# EAGLE board tetris_mega_3 (EAGLE 6.2)
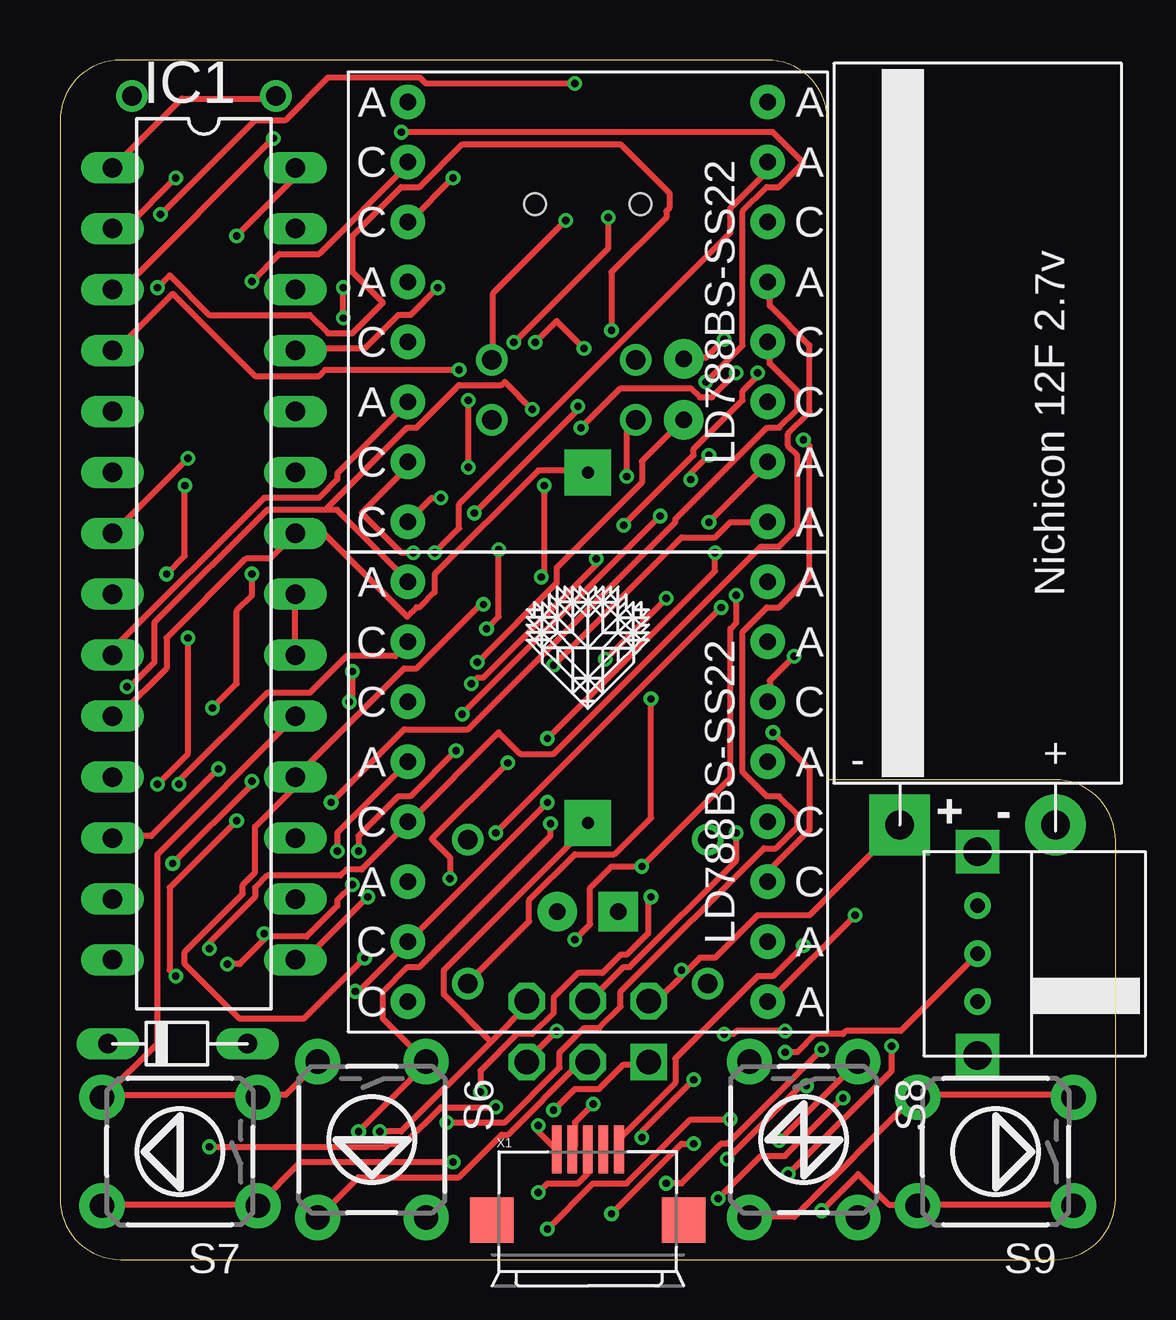
[diagram p0: board, top side]
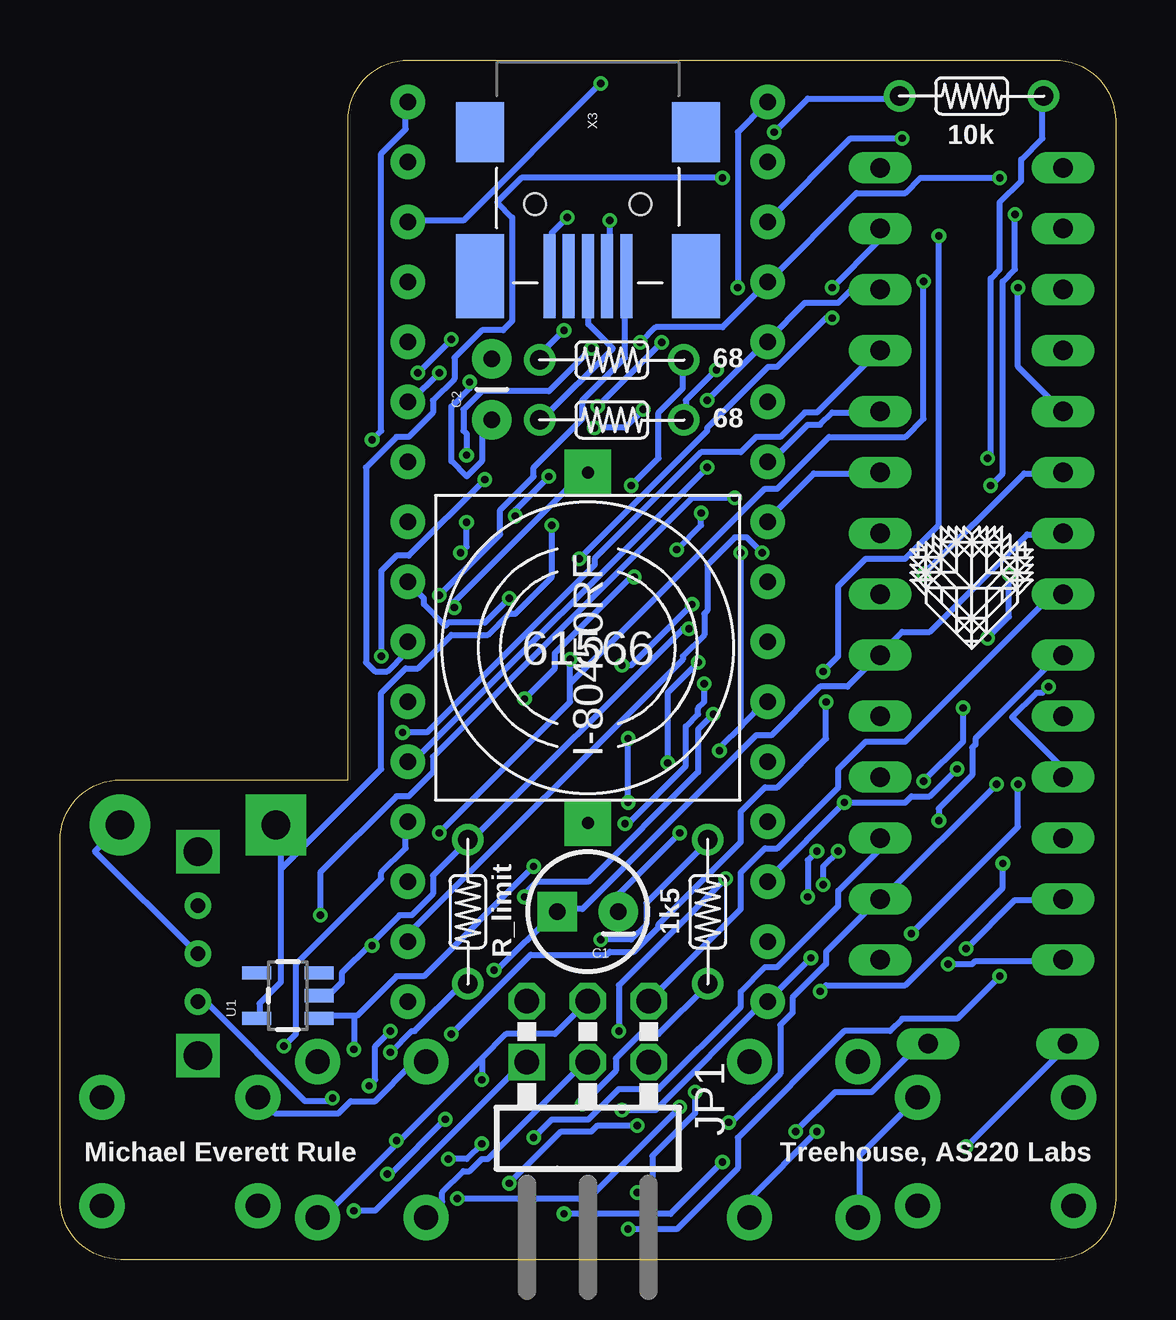
[diagram p1: board, bottom side, seen from below]

Size 44 x 50 mm. Coordinates in mm from the lower left corner, seen from the top.
Outline: 0,47.46 0,2.54 arc90 2.54,0 41.46,0 arc90 44,2.54 44,17.46 arc90 41.46,20 32,20 32,47.46 arc90 29.46,50 2.54,50 arc90 0,47.46
Copper layers (1*16): Top 0.035mm / dielectric 1.5mm / Bottom 0.035mm
Design rules: minimum track width 10mil, minimum drill 12mil, track to track 7mil, track to pad 7mil, pad to pad 7mil, via to via 7mil, smd to smd 0mil, copper to edge 20mil, drill to drill 10mil, minimum pad ring 10mil, minimum via ring 6mil, stop-mask expansion 2mil, vias tented up to drill 100mil, thermal gap 10mil

## Footprints (pad centres in the part's own frame; a part is rotated, then mirrored left to right if it is on the bottom)
CPOL-RADIAL-10UF-25V = drill 0.7 pad 1.651 square: 1 1.27,0 | drill 0.7 pad 1.651: 2 -1.27,0
CAP-PTH-SMALL = drill 0.7 pad 1.651: 1 0,0; 2 2.54,0
DIL28-3 = drill 0.813 long: 1 -16.51,-3.81; 2 -13.97,-3.81; 3 -11.43,-3.81; 4 -8.89,-3.81; 5 -6.35,-3.81; 6 -3.81,-3.81; 7 -1.27,-3.81; 8 1.27,-3.81; 9 3.81,-3.81; 10 6.35,-3.81; 11 8.89,-3.81; 12 11.43,-3.81; 13 13.97,-3.81; 14 16.51,-3.81; 15 16.51,3.81; 16 13.97,3.81; 17 11.43,3.81; 18 8.89,3.81; 19 6.35,3.81; 20 3.81,3.81; 21 1.27,3.81; 22 -1.27,3.81; 23 -3.81,3.81; 24 -6.35,3.81; 25 -8.89,3.81; 26 -11.43,3.81; 27 -13.97,3.81; 28 -16.51,3.81
AVR-ISP-6R = drill 1.016 square: 1 -2.54,-1.27 | drill 1.016 octagon: 2 -2.54,1.27; 3 0,-1.27; 4 0,1.27; 5 2.54,-1.27; 6 2.54,1.27
TACTILE-PTH = drill 1.016 pad 1.88: 1 -3.251,2.261; 2 3.251,2.261; 3 -3.251,-2.261; 4 3.251,-2.261
SOT23-5 = smd 0.55 x 1.2: 1 -0.95,-1.3; 2 0,-1.3; 3 0.95,-1.3; 4 0.95,1.3; 5 -0.95,1.3
LD788BS-SS22 = drill 0.7 pad 1.422: A1 -7.5,8.75; A2 -7.5,1.25; A3 -7.5,-3.75; A4 7.5,8.75; A5 7.5,6.25; A6 7.5,1.25; A7 7.5,-6.25; A8 7.5,-8.75; C1 -7.5,6.25; C2 -7.5,3.75; C3 -7.5,-1.25; C4 -7.5,-6.25; C5 -7.5,-8.75; C6 7.5,3.75; C7 7.5,-1.25; C8 7.5,-3.75
D-7.5 = drill 0.813 long: A 2.81,0; C -3,0
ISK4.1K_I-80450RF_I2G = drill 0.5 pad 1.93 square: P$1 -7.303,0; P$2 7.303,0
NICHICON_10X30 = drill 1.2 pad 2.54 square: P$1 2.75,-1.75 | drill 1.2 pad 2.54: P$2 9.25,-1.75
R-6 = drill 0.8: P$1 -3,0; P$2 3,0
SWITCH = drill 0.6: 1 2.25,6.25; 2 2.25,4.25; 3 2.25,2.25 | drill 1.2 square: C1 2.25,8.5; C2 2.25,0
USB-MICROB = smd 0.4 x 2: D+ 0,3.1; D- -0.65,3.1; GND 1.3,3.1; ID 0.65,3.1; VBUS -1.3,3.1 | smd 1.8 x 1.9: GND@2 -4,0.15; GND@3 4,0.15
USB-MINIB-OLD = smd 2.5 x 2: 1 -3,-4.5; 2 -3,4.5 | smd 3.5 x 2: 3 3,-4.5; 4 3,4.5 | smd 3.5 x 0.5: D+ 3,0; D- 3,0.8; GND 3,-1.6; ID 3,-0.8; VBUS 3.01,1.61 | hole 0.9: 0,2.2; 0,-2.2

## Placement (x,y rotation side)
C1  [CPOL-RADIAL-10UF-25V]  22,14.5 180 bottom
C2  [CAP-PTH-SMALL]  26,35 90 bottom
IC1  MEGA8-P  [DIL28-3]  6,29 270 top
JP1  AVR-ISP-6R  [AVR-ISP-6R]  22,9.5 0 bottom
S6  [TACTILE-PTH]  13,5 270 top
S7  [TACTILE-PTH]  5,4.5 180 top
S8  [TACTILE-PTH]  31,5 270 top
S9  [TACTILE-PTH]  39,4.5 180 top
U1  V_REG_LDOSMD  [SOT23-5]  34.5,11 90 bottom
U$1  LD788BS-SS22  [LD788BS-SS22]  22,19.5 0 top
U$2  LD788BS-SS22  [LD788BS-SS22]  22,39.5 0 top
U$3  D-6  [D-7.5]  5,9 0 top
U$4  I-80450RF  [ISK4.1K_I-80450RF_I2G]  22,25.5 270 bottom
U$5  NICHICON_12F  [NICHICON_10X30]  32.25,19.86 0 top
U$6  R-6  [R-6]  27,14.5 90 bottom
U$7  R-6  [R-6]  6,48.5 0 bottom
U$8  SWITCH  [SWITCH]  36,8.5 0 top
U$9  R-6  [R-6]  21,35 180 bottom
U$10  R-6  [R-6]  21,37.5 0 bottom
U$11  R-6  [R-6]  17,14.5 90 bottom
U$13  [LOGO]  6,28 0 bottom
U$14  [LOGO]  22,25.5 0 top
X1  USB-MICROB  [USB-MICROB]  22,1.5 0 top
X3  USBOLD  [USB-MINIB-OLD]  22,44 270 bottom

## Library data of the parts
C1 C2 S6-S9 U1 X1 X3 = SparkFun
IC1 = atmel; OC_FARNELL: unknown; OC_NEWARK: unknown
JP1 = avr-5-4.16
U$1-U$11 = mrule
U$13 U$14 = mrule2

## Nets
N$1: IC1.17 JP1.4 S8.1 S8.2 U$1.A4 U$2.C1
N$2: IC1.3 U$1.A5 U$2.C2
N$3: IC1.2 U$1.C6 U$2.A2
N$4: IC1.26 U$1.A6 U$2.C3
N$5: IC1.9 U$1.C7 U$2.A3
N$6: IC1.24 U$1.A7 U$2.C4
N$7: IC1.23 U$1.A8 U$2.C5
N$8: IC1.25 U$1.C8 U$2.A1
N$9: U$5.P$2 U$6.P$1 U$8.2
N$10: IC1.15 U$1.C2 U$2.A5
N$11: IC1.14 U$1.A2 U$2.C6
N$12: IC1.13 U$1.C3 U$2.A6
N$13: IC1.12 U$1.A3 U$2.C7
N$14: IC1.11 U$1.A1 U$2.C8
N$15: IC1.6 U$1.C4 U$2.A7
N$16: IC1.18 JP1.1 S9.1 S9.2 U$1.C5 U$2.A8
N$17: C1.2 IC1.10 IC1.22 U$4.P$1
N$18: IC1.19 JP1.3 S6.3 S6.4 S7.3 S7.4 S8.3 S8.4 S9.3 S9.4
N$19: IC1.5 U$10.P$1
N$20: IC1.27 S6.1 S6.2
N$21: U$3.C U$8.3
N$22: IC1.8 JP1.6 U$3.A U$4.P$2
N$23: U1.1 U$11.P$2 X1.VBUS X3.VBUS
N$24: U1.2 U$6.P$2 X1.GND X3.GND
N$25: U$10.P$2 U$11.P$1 X1.D- X3.D-
N$26: C1.1 C2.2 IC1.7 IC1.20 IC1.21 JP1.2 U1.5 U$5.P$1 U$7.P$2
N$27: IC1.4 U$9.P$1
N$28: IC1.16 U$1.C1 U$2.A4
N$29: C2.1 IC1.1 JP1.5 U$7.P$1
N$30: U$9.P$2 X1.D+ X3.D+
N$31: IC1.28 S7.1 S7.2

## Tracks (layer width: path | path; a pad name or v marks a point on that pad's centre or on a via)
N$1  (via drill 0.3)
  Top 0.254: v24.26,5.08 24.26,5.33 v26.42,7.49 | v22.73,25.02 v25.27,27.56 | v28.19,17.78 28.19,16.64 23.75,12.19 23.5,12.19 22.1,10.79 JP1.4 | v8,40.77 9.14,41.91 10.79,41.91 14.48,45.59 14.48,45.72 U$2.C1 | v29.97,4.95 33.15,8.13 S8.1
  Bottom 0.254: v24.26,5.08 23.5,5.84 21.97,5.84 20.7,7.11 19.05,7.11 15.62,10.54 15.62,11.18 14.61,12.19 14.1,12.19 11.56,14.73 11.56,15.37 9.91,17.02 9.91,17.53 IC1.17 | 26.42,8.38 v26.42,7.49 | 26.42,8.38 25.4,9.4 23.37,9.4 22.1,10.67 JP1.4 | v25.27,27.56 26.29,26.54 27.81,26.54 27.94,26.42 28.83,27.3 28.83,27.56 29.46,28.19 U$1.A4 | 22.73,24 22.73,23.24 v28.19,17.78 | 22.73,24 v22.73,25.02 | v8,40.77 8,35.05 8.76,34.29 11.94,34.29 14.1,32.13 14.61,32.13 22.73,24 | 26.42,8.38 29.91,4.89 | 29.91,4.89 33.02,1.78 33.15,1.78 S8.2 | v29.97,4.95 29.91,4.89
N$2  (via drill 0.3)
  Top 0.254: v8.89,46.74 2.67,40.51 2.29,40.51 IC1.3 | v16.38,45.09 14.61,43.31 U$2.C2
  Bottom 0.254: v8.89,46.74 11.05,46.74 14.48,43.31 U$2.C2 | v16.38,45.09 24.77,45.09 25.78,44.07 25.15,43.43 25.15,39.12 25.53,38.73 26.42,38.73 27.56,37.59 27.56,36.7 28.45,35.81 28.45,35.31 29.46,34.29 29.97,34.29 31.24,33.02 31.24,24.89 30.86,24.51 30.35,24.51 29.59,25.27 29.59,25.65 U$1.A5
N$3  (via drill 0.3)
  Top 0.254: v4.83,45.09 2.79,43.05 2.29,43.05 IC1.2 | v30.61,25.15 29.59,24.13 29.59,23.37 U$1.C6 | v26.29,32.51 26.29,32.77 v27.05,33.53 | v21.84,37.97 20.7,39.12 v19.81,38.23
  Bottom 0.254: v4.83,45.09 8.13,45.09 8.76,44.45 10.79,44.45 14.48,40.77 U$2.A2 14.61,40.64 16.38,38.86 19.18,38.86 v19.81,38.23 | v30.61,25.15 30.61,28.7 29.97,29.34 29.46,29.34 v26.29,32.51 | v27.05,33.53 27.05,34.42 27.18,34.54 27.18,35.43 26.42,36.2 23.62,36.2 v21.84,37.97
N$4  (via drill 0.3)
  Top 0.254: v17.02,35.81 v17.02,33.02
  Bottom 0.254: IC1.26 9.91,40.39 11.05,40.39 11.56,39.88 12.95,39.88 14.48,38.35 U$2.C3 14.61,38.23 v17.02,35.81 | v17.02,33.02 29.21,20.83 29.46,20.83 U$1.A6
N$5  (via drill 0.3)
  Top 0.254: IC1.9 2.29,25.27 2.29,25.53 8.51,31.75 10.79,31.75 11.56,32.51 11.56,32.77 14.48,35.69 U$2.A3 | v34.67,8.89 34.67,7.87 v30.35,3.56 | v27.94,5.84 26.29,5.84 23.62,3.17 22.23,3.17 v20.32,1.27 | v4.83,11.81 4.57,12.06 4.57,15.49 v7.37,18.29
  Bottom 0.254: v34.67,8.89 34.16,9.4 34.16,12.32 30.61,15.88 30.61,16.13 29.59,17.14 29.59,18.16 U$1.C7 | v30.35,3.56 30.23,3.56 v27.94,5.84 | v20.32,1.27 18.29,1.27 15.75,3.81 15.75,5.08 11.3,9.53 9.4,9.53 8.89,10.03 6.6,10.03 v4.83,11.81 | v7.37,18.29 7.37,18.8 5.97,20.19 5.97,21.34 5.84,21.46 5.84,21.72 2.29,25.27 IC1.9
N$6  (via drill 0.3)
  Top 0.254: v14.73,29.46 14.22,29.46 12.57,31.11 14.61,33.15 U$2.C4
  Bottom 0.254: IC1.24 9.91,35.31 11.81,35.31 12.32,34.8 12.83,34.8 14.48,33.15 U$2.C4 | v14.73,29.46 15.37,30.1 15.88,30.1 17.02,28.96 17.02,27.05 17.14,26.92 17.14,26.04 18.03,25.15 18.03,25.02 29.46,13.59 29.46,13.34 U$1.A7
N$7  (via drill 0.3)
  Top 0.254: v33.15,14.35 29.59,10.79 U$1.A8 | v15.88,31.75 15.49,31.75 14.61,30.86 U$2.C5
  Bottom 0.254: IC1.23 9.91,32.77 12.57,32.77 14.48,30.86 U$2.C5 | v33.15,14.35 33.15,16.13 29.97,19.3 29.46,19.3 28.45,20.32 28.45,20.95 17.65,31.75 v15.88,31.75
N$8  (via drill 0.3)
  Top 0.254: v15.75,40.51 14.61,39.37 14.1,39.37 12.7,37.97 9.91,37.97 IC1.25 | v29.72,21.97 31.24,20.45 31.24,17.91 29.59,16.26 29.59,15.88 U$1.C8
  Bottom 0.254: v15.75,40.51 15.75,46.99 14.61,48.13 U$2.A1 | v29.72,21.97 28.7,21.97 21.72,28.96 21.72,29.21 17.27,33.66 15.62,33.66 14.99,34.29 13.97,34.29 12.95,35.31 12.45,35.31 9.91,37.85 IC1.25
N$9  (via drill 0.3)
  Top 0.254: v30.23,8.64 30.73,8.64 31.5,9.4 32.64,9.4 32.77,9.53 35.05,9.53 38.23,12.7 U$8.2
  Bottom 0.254: U$8.2 38.35,12.83 42.55,17.02 41.53,18.03 U$5.P$2 | v30.23,8.64 29.34,9.53 29.21,9.53 27.3,11.43 27.05,11.43 U$6.P$1
N$10  (via drill 0.3)
  Top 0.254: v12.83,15.11 10.29,12.57 9.91,12.57 IC1.15 | v12.45,17.02 12.45,17.65 14.1,19.3 14.61,19.3 v16.51,21.21 | v15.62,29.46 16.64,30.48 16.64,31.5 27.94,42.8 27.94,43.81 29.46,45.34 29.46,45.72 U$2.A5
  Bottom 0.254: v12.83,15.11 12.83,16.64 v12.45,17.02 | v16.51,21.21 16.51,21.34 15.56,22.29 | 15.56,22.29 14.61,23.24 U$1.C2 | v15.62,29.46 15.62,22.35 15.56,22.29
N$11  (via drill 0.3)
  Top 0.254: v6.99,12.32 7.49,12.32 8.57,13.4 | 8.57,13.4 8.64,13.46 10.29,13.46 11.56,14.73 11.56,14.99 v12.19,15.62 | v11.56,17.02 11.56,17.78 14.48,20.7 U$1.A2 | v21.46,49.02 15.24,49.02 14.99,49.28 11.18,49.28 9.4,47.5 8.13,47.5 v4.19,43.56 | v5.21,32.26 5.21,29.34 v4.45,28.57 | v5.33,25.91 5.33,21.08 v4.06,19.81 | v8.51,13.59 8.51,13.46 8.57,13.4
  Bottom 0.254: v6.99,12.32 5.97,12.32 5.84,12.45 2.29,12.45 IC1.14 | v12.19,15.62 12.19,16.38 v11.56,17.02 | v21.46,49.02 27.18,43.31 29.46,43.31 U$2.C6 | v4.19,43.56 4.19,41.27 4.7,40.77 4.7,32.77 v5.21,32.26 | v4.45,28.57 4.45,26.8 v5.33,25.91 | v4.06,19.81 4.06,18.03 v8.51,13.59
N$12  (via drill 0.3)
  Top 0.254: v6.22,12.95 6.22,13.21 8.13,15.11 8.13,15.49 8.64,16 11.68,16 11.94,16.26 12.57,16.26 14.48,18.16 U$1.C3 14.61,18.29 18.29,21.97 19.18,21.08 20.57,21.08 29.21,29.72 29.97,29.72 30.73,30.48 30.73,33.53 30.35,33.91 30.35,34.42 31.24,35.31 31.24,38.1 29.59,39.75 29.59,40.64 U$2.A6
  Bottom 0.254: v6.22,12.95 4.19,14.99 2.29,14.99 IC1.13
N$13  (via drill 0.3)
  Top 0.254: v6.6,20.45 3.81,17.65 2.29,17.65 IC1.12 | v11.3,19.05 14.35,22.1 17.02,22.1 25.65,30.73 25.65,30.86 29.46,34.67 29.97,34.67 30.73,35.43 30.73,36.2 29.59,37.34 29.59,38.23 U$2.C7
  Bottom 0.254: v6.6,20.45 7.75,19.3 8.51,19.3 8.76,19.05 v11.3,19.05 14.48,15.88 U$1.A3
N$14  (via drill 0.3)
  Top 0.254: v2.79,23.88 2.92,23.88 3.94,24.89 3.94,26.54 8.64,31.24 11.05,31.24 | 11.05,31.24 11.56,31.24 14.48,28.32 U$1.A1 | v28.19,36.96 27.18,35.94 26.67,35.94 26.29,36.32 23.37,36.32 v21.72,34.67 | v19.68,35.43 18.54,36.58 18.41,36.45 16.64,36.45 14.86,34.67 14.48,34.67 11.05,31.24
  Bottom 0.254: v2.79,23.88 3.05,23.62 3.3,23.62 4.32,22.61 2.29,20.57 2.29,20.19 IC1.11 | v28.19,36.96 29.34,35.81 29.46,35.81 U$2.C8 | v21.72,34.67 20.45,34.67 v19.68,35.43
N$15  (via drill 0.3)
  Top 0.254: v8,28.57 8,27.69 7.37,27.05 7.37,24 v6.35,22.99 | v8,19.94 8,19.81 v4.7,16.51 | v12.32,11.18 12.45,11.18 14.48,13.21 U$1.C4 14.61,13.34 v20.32,19.05 | v27.05,30.73 29.46,33.15 U$2.A7 | v27.3,29.46 27.3,28.7 v20.32,21.72
  Bottom 0.254: v8,28.57 3.81,32.77 2.29,32.77 IC1.6 | v6.35,22.99 6.35,21.59 v8,19.94 | v4.7,16.51 4.7,15.49 8.76,11.43 12.06,11.43 v12.32,11.18 | v27.05,30.73 27.05,29.72 v27.3,29.46 | v20.32,19.05 v20.32,21.72
N$16  (via drill 0.3)
  Top 0.254: S9.1 42.16,2.29 35.81,2.29 S9.2 35.69,2.29 34.54,2.29 33.27,3.56 v31.75,2.03 | v12.7,12.57 10.16,10.03 7.49,10.03 5.21,12.32 5.21,12.83 7.62,15.24 7.62,15.62 8.13,16.13 8.13,18.03 9.78,19.68 9.78,20.07 IC1.18 9.91,20.19 14.35,24.64 14.86,24.64 17.53,27.3 v17.65,27.3 | v20.57,24.77 25.91,30.1 27.3,30.1 27.94,30.73 29.46,30.73 U$2.A8 | v20.57,6.22 21.46,7.11 22.48,7.11 23.5,8.13 24.51,8.13 JP1.1
  Bottom 0.254: v12.7,12.57 14.48,10.79 U$1.C5 14.61,10.79 19.18,6.22 v20.57,6.22 | v20.57,24.77 20.19,24.77 v17.65,27.3 | v31.75,2.03 30.86,2.03 24.64,8.26 JP1.1
N$17  (via drill 0.3)
  Top 0.254: IC1.10 2.29,22.73 2.54,22.73 4.45,24.64 4.45,25.91 7.75,29.21 8.76,29.21 9.78,30.23 IC1.22 9.91,30.23 11.05,30.23 14.48,26.8 14.86,27.18 14.99,27.18 15.62,27.81 15.62,28.57 19.94,32.89 21.97,32.89 U$4.P$1 | v27.56,27.18 v18.16,17.78
  Bottom 0.254: v18.16,17.78 20.7,15.24 20.7,14.61 C1.2 | v27.56,27.18 27.56,27.43 22.1,32.89 U$4.P$1
N$18
  Top 0.254: S9.3 42.16,6.86 35.81,6.86 S9.4 35.69,6.86 30.61,1.78 28.83,1.78 S8.4 | S6.3 10.67,8.13 9.4,6.86 8.26,6.86 S7.3 8.13,6.86 2.03,6.86 S7.4 1.78,6.73 4.06,9.02 4.06,16.89 9.78,22.61 IC1.19 | JP1.3 21.97,8.13 21.59,8.13 18.67,5.21 18.41,5.21 16.64,3.43 12.45,3.43 10.79,1.78 S6.4
  Bottom 0.254: JP1.3 22.1,8.13 22.23,8.13 26.16,4.19 26.42,4.19 26.92,3.68 27.18,3.68 28.07,2.79 28.07,2.41 28.7,1.78 S8.4 | S8.3 28.83,8.13 29.34,8.13 30.86,6.6 31.88,6.6 32.38,6.1 35.05,6.1 35.69,6.73 S9.4 | S6.4 10.67,1.78 10.67,4.32 8.26,6.73 S7.3
N$19  (via drill 0.3)
  Top 0.254: v22.99,38.73 22.99,41.15 25.27,43.43 25.27,43.69 25.4,43.81 25.4,44.45 23.37,46.48 16.76,46.48 14.99,44.7 14.22,44.7 12.19,42.67 12.19,41.15 13.46,39.88 12.19,38.61 11.18,38.61 10.41,39.37 6.22,39.37 4.57,41.02 v4.06,40.51
  Bottom 0.254: v22.99,38.73 23.88,37.85 23.88,37.59 U$10.P$1 | v4.06,40.51 4.06,37.21 2.29,35.43 IC1.5
N$20  (via drill 0.3)
  Top 0.254: v11.81,39.24 v11.81,40.51 | v22.35,29.21 22.35,28.96 17.65,24.26 17.4,24.26 v17.14,24 | v20.45,18.16 20.45,17.65 14.99,12.19 14.48,12.19 13.46,11.18 13.46,10.03 15.24,8.26 S6.1 15.24,8.13 v12.45,5.33
  Bottom 0.254: v11.81,40.51 9.91,42.42 9.91,42.93 IC1.27 | v11.81,39.24 12.06,39.24 14.1,37.21 14.48,37.21 17.02,34.67 17.02,34.54 v22.35,29.21 | v17.14,24 17.14,23.24 17.4,22.99 17.4,22.73 17.91,22.23 17.91,20.57 20.32,18.16 v20.45,18.16 | v12.45,5.33 15.24,2.54 15.24,1.78 S6.2
N$21  (via drill 0.3)
  Top 0.254: v32.64,6.73 30.23,4.32 29.21,4.32 v27.43,2.54 | v18.16,6.35 15.88,6.35 14.35,4.83 13.72,4.83 13.59,4.7 v6.22,4.7
  Bottom 0.254: v32.64,6.73 32.77,6.6 33.78,6.6 37.85,10.67 38.23,10.67 U$8.3 | v27.43,2.54 21.97,2.54 v18.16,6.35 | v6.22,4.7 2.03,8.89 U$3.C
N$22  (via drill 0.3)
  Top 0.254: v13.34,5.33 14.22,5.33 17.97,9.08 | 17.97,9.08 19.56,10.67 JP1.6 | 17.97,9.08 16,11.05 16,12.06 21.97,18.03 21.97,18.16 U$4.P$2
  Bottom 0.254: v13.34,5.33 11.68,6.99 10.16,6.99 8.26,8.89 7.87,8.89 U$3.A | IC1.8 2.29,27.69 2.67,27.69 8.76,21.59 10.41,21.59 11.56,20.45 11.56,19.68 14.1,17.14 14.61,17.14 15.62,16.13 15.62,14.61 19.43,10.79 JP1.6
N$23  (via drill 0.3)
  Top 0.254: v21.46,13.34 22.1,13.97 22.1,15.49 22.99,16.38 v24.26,16.38 27.94,20.07 27.94,26.29 28.19,26.54 v28.19,27.69 | v19.94,5.59 19.81,5.46 20.57,4.7 X1.VBUS | v25.27,3.17 25.91,3.17 27.56,4.83 27.81,4.83 v31.75,8.76
  Bottom 0.254: 31.75,10.16 31.62,10.16 29.97,11.81 28.83,11.81 v24.26,16.38 | 31.75,10.16 33.15,10.16 U1.1 | v21.46,13.34 20.19,13.34 19.56,13.97 19.56,14.86 17.02,17.4 U$11.P$2 | v19.94,5.59 21.59,5.59 21.84,5.33 23.11,5.33 v25.27,3.17 | 31.75,10.16 v31.75,8.76 | v28.19,27.69 25.65,30.23 25.65,31.24 24.26,32.64 24.26,33.02 22.23,35.05 22.23,35.81 20.45,37.59 20.45,40.89 X3.VBUS
N$24  (via drill 0.3)
  Top 0.254: v30.99,13.08 29.72,11.81 29.08,11.81 25.65,8.38 25.65,7.37 23.37,5.08 23.37,4.7 X1.GND | v22.86,43.43 22.86,42.16 v18.92,38.23 | v21.59,35.56 21.59,35.43 v17.27,31.11 | v18.29,29.59 18.29,26.8 v17.78,26.29
  Bottom 0.254: 31.05,13.14 29.84,14.35 29.34,14.35 28.45,15.24 28.45,16 27.05,17.4 U$6.P$2 26.92,17.4 18.03,26.29 v17.78,26.29 | 31.05,13.14 32.26,11.94 32.26,11.56 32.77,11.05 33.15,11.05 U1.2 | v30.99,13.08 31.05,13.14 | v22.86,43.43 23.5,42.8 23.5,41.02 X3.GND | v21.59,35.56 v18.92,38.23 | v17.27,31.11 17.27,30.61 v18.29,29.59
N$25  (via drill 0.3)
  Top 0.254: v21.08,43.31 18.03,40.26 18.03,37.59 U$10.P$2 | v22.23,6.48 21.46,5.71 21.46,4.7 X1.D- | v20.19,32.26 20.19,28.57 v20.07,28.45 | v24.64,23.37 24.64,18.41 23.11,16.89 21.46,16.89 19.56,14.99 19.56,14.1 17.02,11.56 U$11.P$1
  Bottom 0.254: v21.08,43.31 21.08,41.02 X3.D- | v22.23,6.48 20.83,7.87 20.83,8.38 19.81,9.4 19.05,9.4 17.02,11.43 U$11.P$1 | v20.19,32.26 19.05,33.4 19.05,35.31 18.03,36.32 18.03,37.47 U$10.P$2 | v20.07,28.45 20.19,28.45 23.37,25.27 23.37,24.64 v24.64,23.37
N$26  (via drill 0.3)
  Top 0.254: 25.97,11.87 26.67,12.57 27.3,12.57 29.08,14.35 31.24,14.35 34.92,18.03 U$5.P$1 | 25.97,11.87 24.89,10.79 24.64,10.79 JP1.2 | v27.69,38.35 26.92,37.59 26.04,37.59 C2.2 | v29.08,36.96 29.08,36.83 28.45,36.2 28.45,35.81 26.42,33.78 26.42,33.53 v23.5,30.61 | v5.33,33.4 2.29,30.35 IC1.7 | IC1.20 9.78,25.27 9.78,27.69 IC1.21 | v25.91,12.06 25.91,11.94 25.97,11.87
  Bottom 0.254: 34.8,16.26 34.8,17.91 34.92,18.03 U$5.P$1 | 34.8,16.26 34.8,11.56 35.69,10.67 35.69,10.16 U1.5 | v29.08,36.96 v27.69,38.35 | v23.5,30.61 23.5,28.45 25.02,26.92 25.27,26.92 26.16,26.04 27.69,26.04 29.08,24.64 29.59,24.64 30.61,23.62 30.61,20.45 34.8,16.26 | v5.33,33.4 5.21,33.53 5.21,40.89 4.83,41.27 4.83,44.07 3.94,44.96 3.94,45.85 3.05,46.74 3.05,48.39 U$7.P$2 | IC1.7 2.29,30.23 3.68,30.23 7.75,26.16 8.89,26.16 9.78,25.27 IC1.20 9.91,25.15 11.18,23.88 12.32,23.88 14.35,21.84 14.99,21.84 22.23,14.61 23.24,14.61 C1.1 23.37,14.48 25.78,12.06 v25.91,12.06
N$27  (via drill 0.3)
  Top 0.254: v16.64,37.08 11.05,37.08 10.79,36.83 8.13,36.83 4.7,40.26 2.29,37.85 IC1.4
  Bottom 0.254: v16.64,37.08 17.91,35.81 17.91,35.05 U$9.P$1
N$28  (via drill 0.3)
  Top 0.254: v4.95,19.81 4.95,19.94 8.64,23.62 10.41,23.62 11.94,25.15 13.97,25.15 14.48,25.65 U$1.C1 | v30.99,34.16 31.24,33.91 31.24,28.45 29.97,27.18 29.46,27.18 28.45,26.16 28.45,20.32 29.46,19.3 29.97,19.3 30.73,18.54 30.73,18.03 29.84,17.14 29.34,17.14 23.37,11.18 23.37,10.54 22.48,9.65 21.84,9.65 20.83,8.64 20.83,8 18.54,5.71 v16.13,5.71
  Bottom 0.254: v4.95,19.81 9.65,15.11 9.78,15.11 IC1.16 9.91,14.99 12.06,12.83 12.06,12.32 13.46,10.92 13.46,10.29 13.97,9.78 13.97,7.75 16,5.71 v16.13,5.71 | v30.99,34.16 30.61,34.54 30.61,46.1 29.59,47.12 29.59,48.13 U$2.A4
N$29  (via drill 0.3)
  Top 0.254: U$7.P$1 8.89,48.39 5.08,48.39 2.29,45.59 IC1.1 | v20.7,9.53 19.56,8.38 19.56,8.26 JP1.5 | v16.26,15.88 16.26,16.76 15.49,17.53 v18.67,20.7 | v17.4,24.89 20.7,28.19 20.7,28.83 24.26,32.38 24.26,33.27 25.91,34.92 C2.1 | v14.22,46.99 29.72,46.99 30.99,45.72 29.97,44.7 29.46,44.7 28.45,43.69 28.45,38.1 v26.92,36.58
  Bottom 0.254: v20.7,9.53 20.7,11.43 v16.26,15.88 | v18.67,20.7 18.67,23.62 v17.4,24.89 | v14.22,46.99 12.83,48.39 9.02,48.39 U$7.P$1 | v26.92,36.58 26.92,36.32 27.69,35.56 27.69,33.27 27.05,32.64 26.42,33.27 26.42,34.54 26.04,34.92 C2.1
N$30  (via drill 0.3)
  Top 0.254: v19.94,2.79 20.32,3.17 21.59,3.17 21.97,3.56 21.97,4.57 X1.D+ | v17.53,6.99 17.53,7.87 19.05,9.4 19.68,9.4 20.57,10.29 20.57,10.92 21.59,11.94 22.61,11.94 23.37,12.7 23.62,12.7 24.51,13.59 24.51,14.99 v24.64,15.11 | v25.02,30.99 v16.76,22.73 | v23.62,32.64 23.62,34.67 23.88,34.92 U$9.P$2
  Bottom 0.254: v19.94,2.79 19.3,3.43 19.3,4.32 17.53,6.1 v17.53,6.99 | v24.64,15.11 24.64,15.24 24.13,15.75 21.97,15.75 17.4,20.32 17.4,22.1 v16.76,22.73 | v25.02,30.99 25.02,31.24 v23.62,32.64 | X3.D+ 21.97,40.89 21.97,38.99 20.95,37.97 23.88,35.05 U$9.P$2
N$31  (via drill 0.3)
  Top 0.254: v7.37,42.67 9.78,45.09 9.78,45.47 IC1.28 | v12.19,24.51 12.19,23.37 v12.06,23.24 | v27.69,9.4 28.07,9.4 28.19,9.53 v30.23,9.53 | v31.11,7.24 30.86,7.24 v27.81,4.19 | v26.42,4.83 25.91,4.83 v22.99,1.91 | v16.38,4.06 10.03,4.06 8.26,2.29 S7.1 8.13,2.29 1.78,2.29 S7.2
  Bottom 0.254: v7.37,42.67 7.37,30.61 8.76,29.21 10.41,29.21 11.56,28.07 11.56,25.15 v12.19,24.51 | v12.06,23.24 12.06,21.72 14.1,19.68 14.61,19.68 15.62,18.67 15.62,17.4 19.05,13.97 19.05,13.84 20.07,12.83 21.08,12.83 21.21,12.7 24.38,12.7 v27.69,9.4 | v30.23,9.53 30.86,8.89 30.86,7.49 v31.11,7.24 | v27.81,4.19 27.05,4.19 v26.42,4.83 | v22.99,1.91 18.54,1.91 v16.38,4.06

## Text on the board
tPlace: + | -
bPlace: 10k | 68 | 68 | 61566 | 1k5 | R_limit | Treehouse, AS220 Labs | Michael Everett Rule